# Altium PCB FPGA_board.PcbDoc (part 1 of 7)
Units mm, origin at the board's own origin, x right, y up, seen from the top; angles counter-clockwise.
Board outline 120 x 95 mm, 2 copper layers (Top Layer, Bottom Layer); 242 components, 219 nets, 1224 pads, 430 vias.
Unrouted connection lines stored in the file: 9.
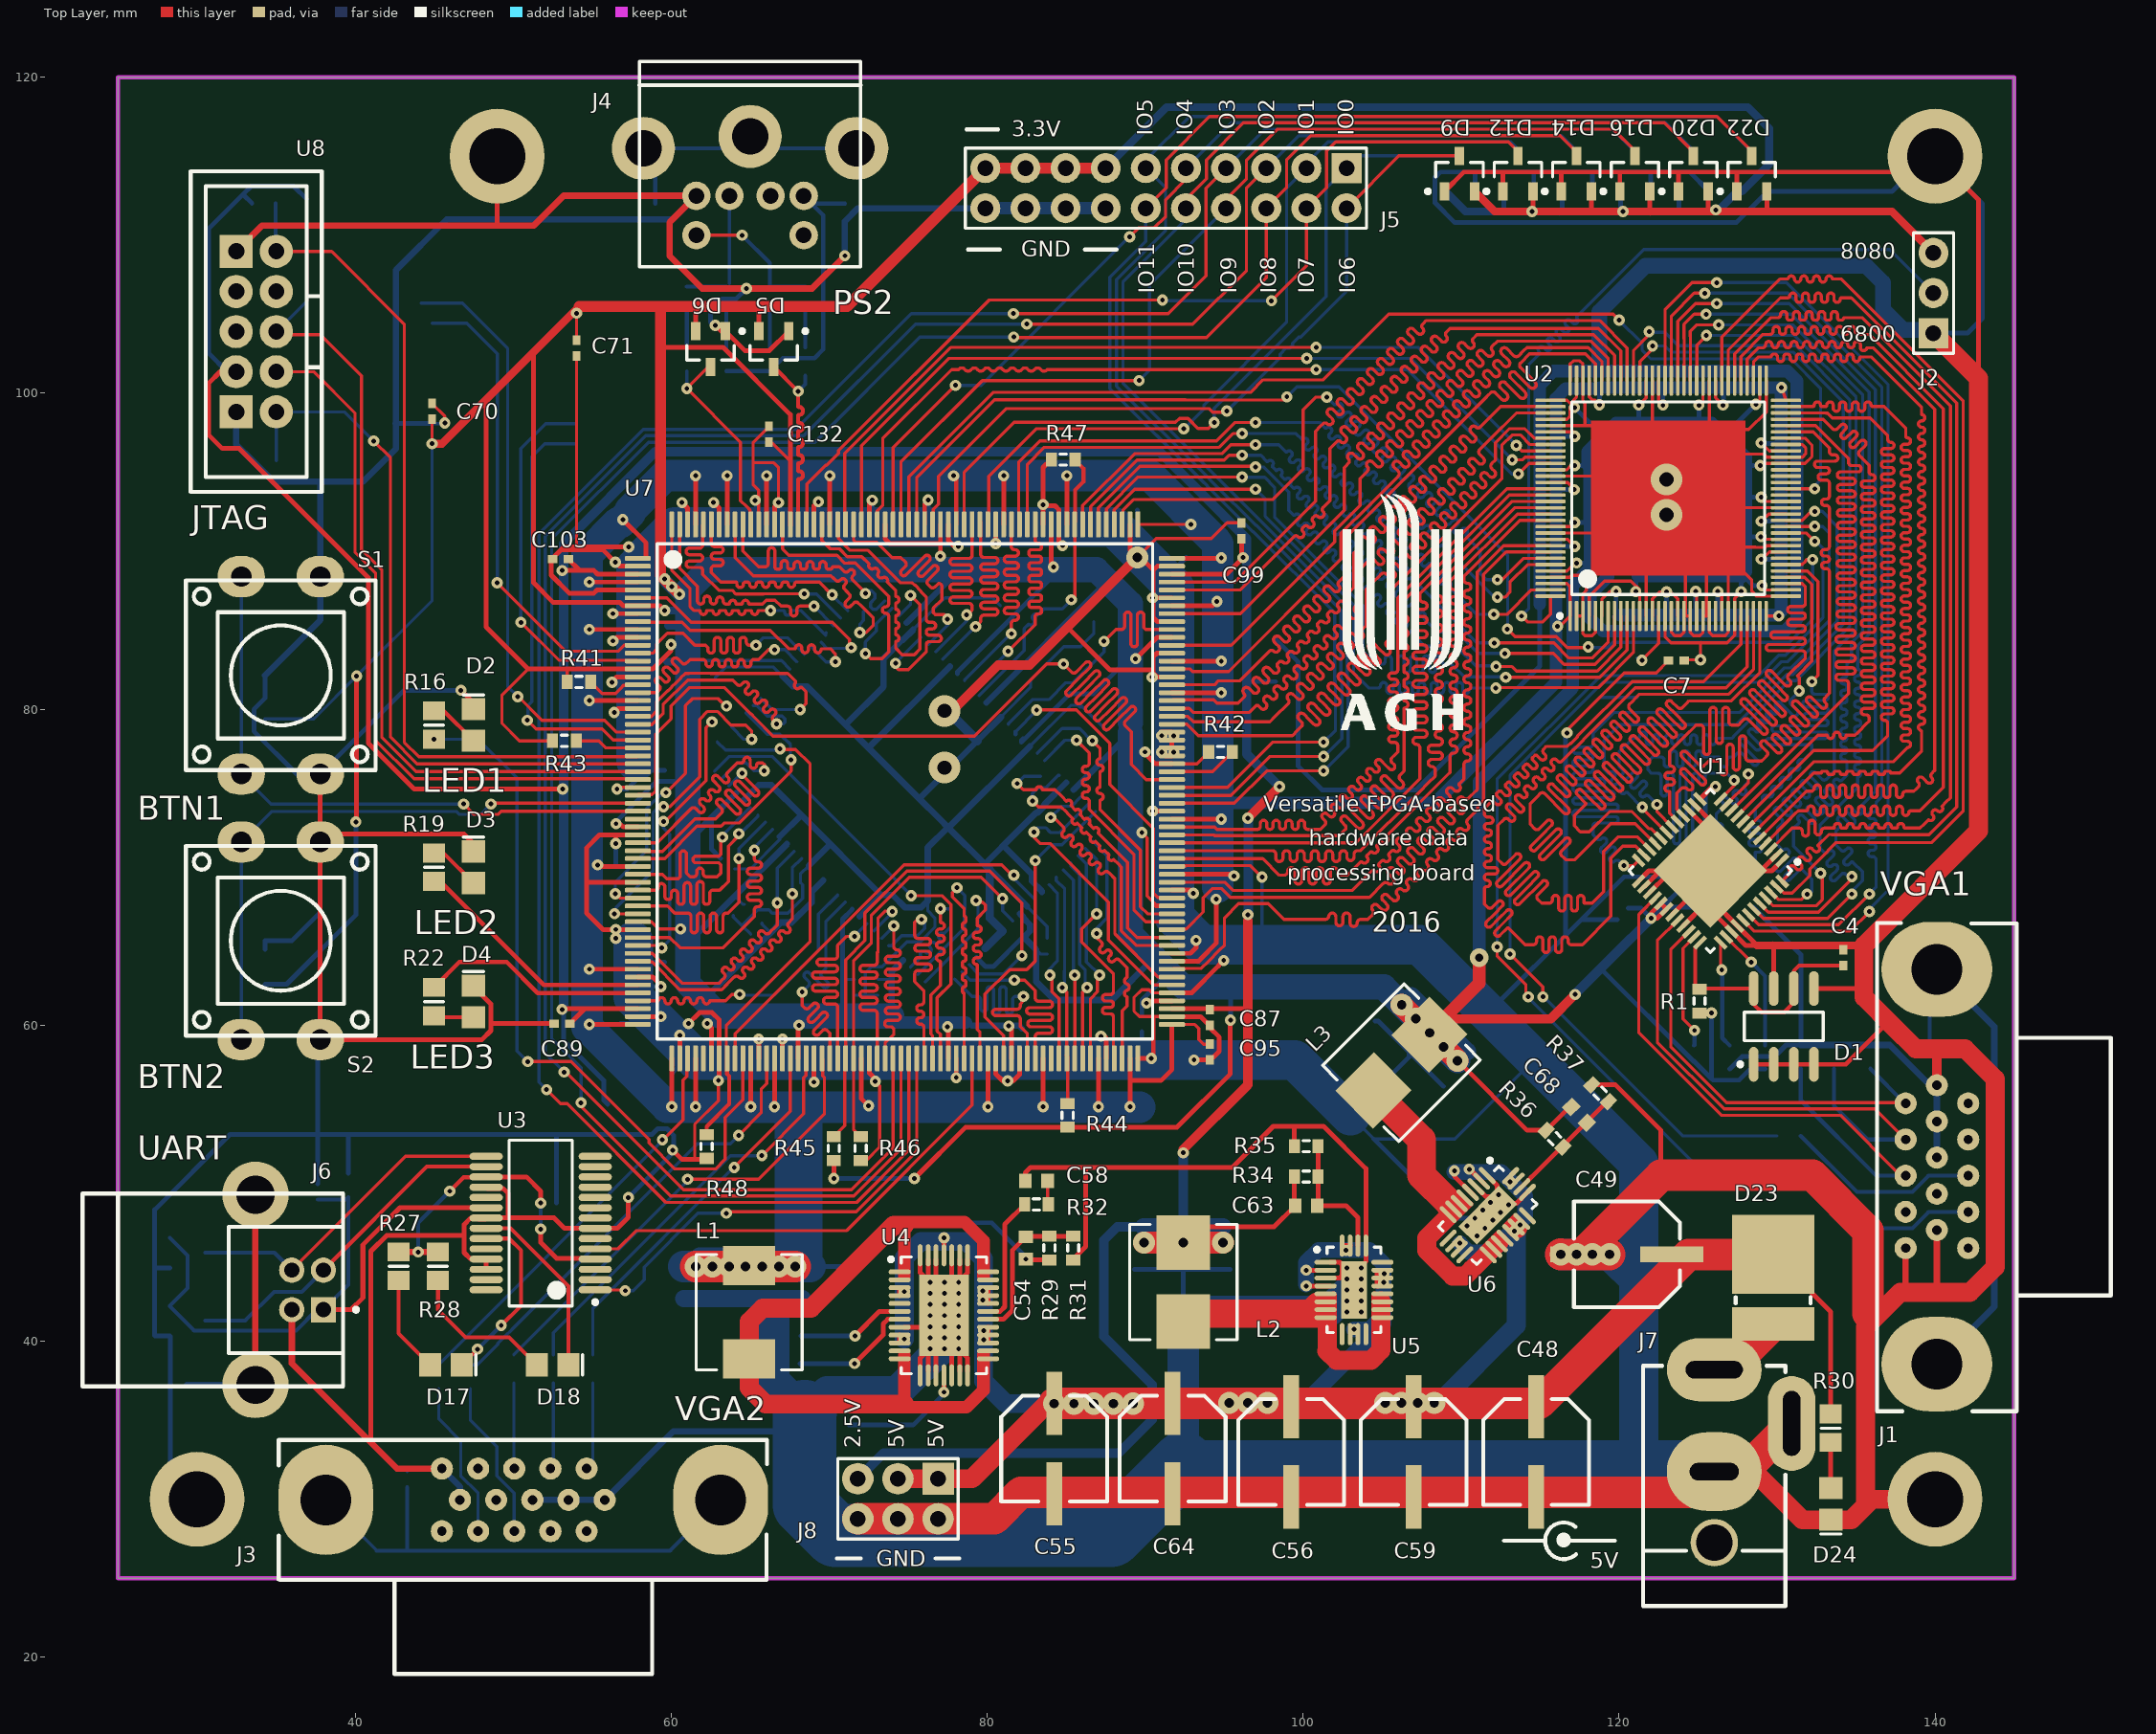
[diagram p0: Top Layer view]
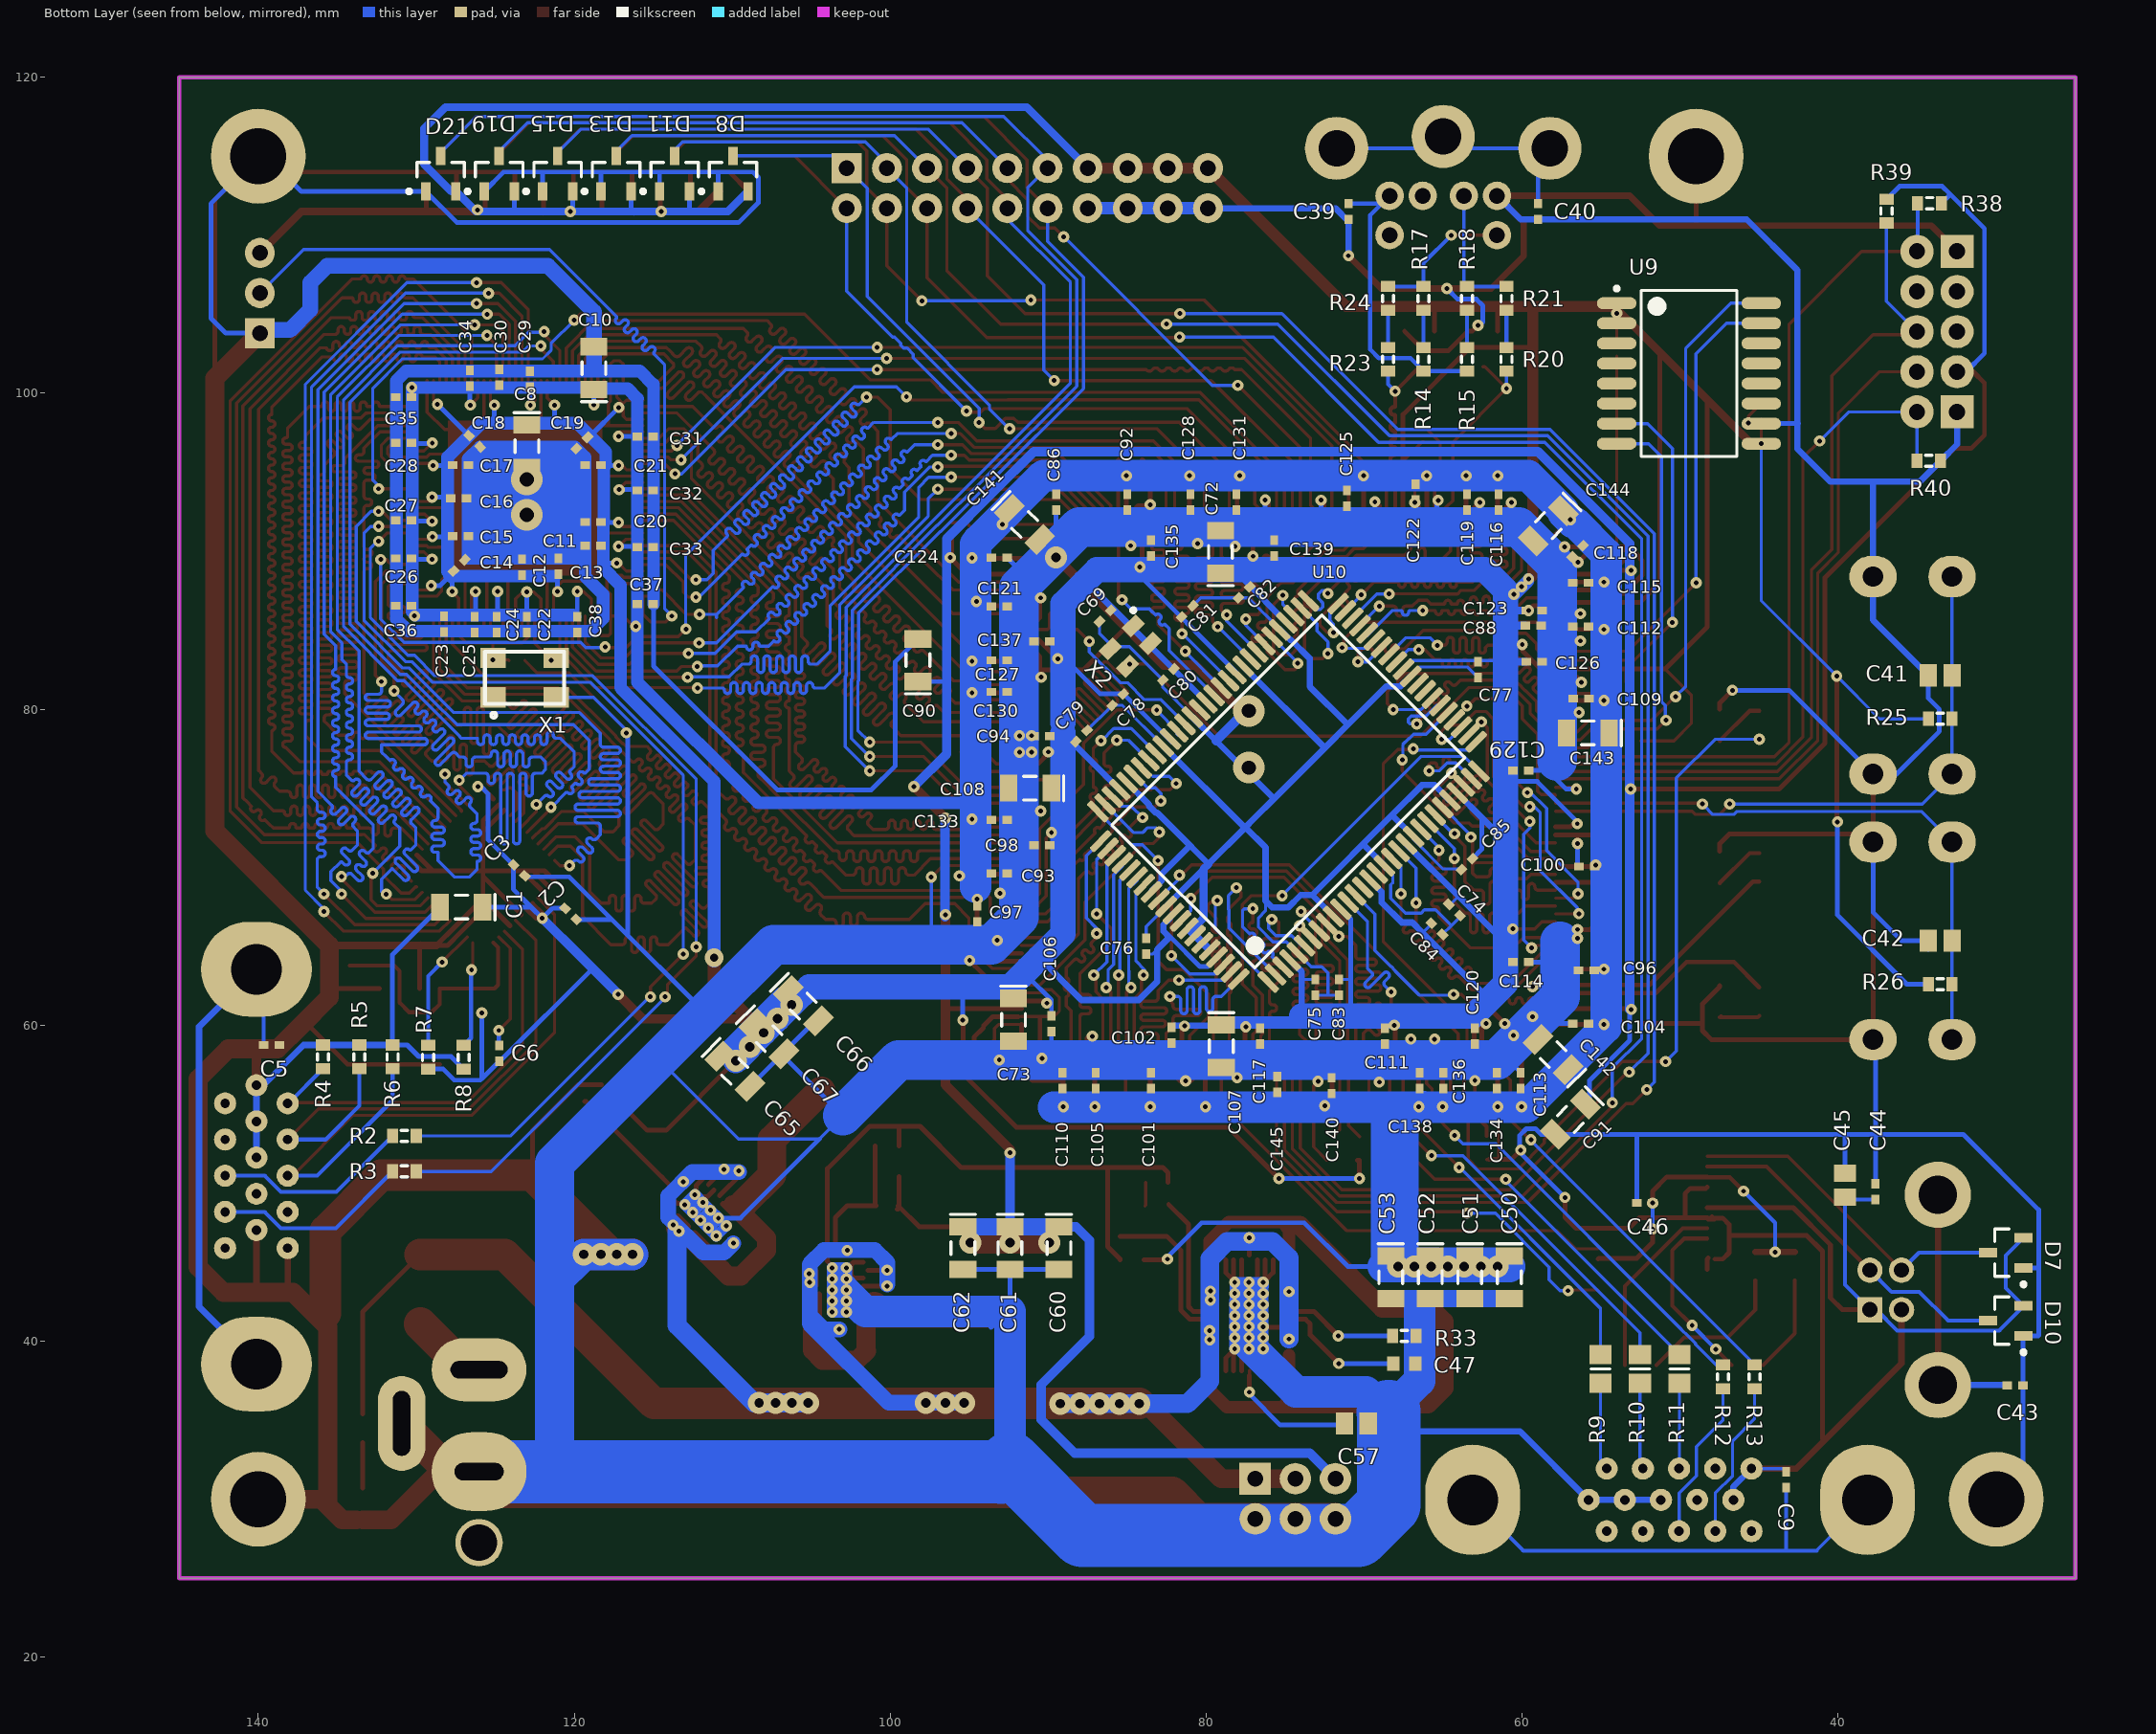
[diagram p1: Bottom Layer view, seen from below]

## Layer stack, top to bottom
Top Layer: signal copper 0.0356
Dielectric: dielectric 0.32, FR-4, Dk 4.8
Bottom Layer: signal copper 0.0356

## Board outline
25,25 25,120 145,120 145,25

## Design rules (kind name [scope] priority, off if disabled: settings)
Clearance [InComponent('U2')] p1: gap=0.18
Clearance others [All] p2: gap=0.2
ComponentClearance [All] p1 off: gap=0 collisioncheckmode=3 verticalgap=100 showdistances=FALSE
FanoutControl Fanout_BGA [IsBGA] p1 off: bgadir=Out bgaviamode=Centered fanoutstyle=Auto fanoutdirection=Alternating viagrid=0.025 // Fanout_BGA (Default Rule)
FanoutControl Fanout_LCC [IsLCC] p2 off: bgadir=Out bgaviamode=Centered fanoutstyle=Auto fanoutdirection=Alternating viagrid=0.025 // Fanout_LCC (Default Rule)
FanoutControl Fanout_SOIC [IsSOIC] p3 off: bgadir=Out bgaviamode=Centered fanoutstyle=Auto fanoutdirection=Alternating viagrid=0.025 // Fanout_SOIC (Default Rule)
FanoutControl Fanout_Small [(CompPinCount < 5)] p4 off: bgadir=Out bgaviamode=Centered fanoutstyle=Auto fanoutdirection=OutThenIn viagrid=0.025 // Fanout_Small (Default Rule)
FanoutControl Fanout_Default [All] p5: bgadir=In bgaviamode=Closest fanoutstyle=BGA fanoutdirection=Alternating viagrid=0.025 // Fanout_Default (Default Rule)
Height [All] p1 off: minheight=0 maxheight=25.4 prefheight=12.7
HoleSize [All] p1: absolutevalues=TRUE maxlimit=5 minlimit=0.3 maxpercent=80.000 minpercent=20.000
Length [InNetClass('MEM_TO_FPGA_DATA')] p1 off: maxlimit=17.23 minlimit=15
Length "InNet('SRAM_DQ5') Or InNet('SRAM_DQ9')" [InNet('SRAM_DQ[0..31]')] p2 off: maxlimit=19.148 minlimit=0
MinimumSolderMaskSliver [All] p1: minsoldermaskwidth=0
PlaneClearance [All] p1: clearance=1.5
PlaneConnect [All] p1: planeconnectstyle=Direct reliefexpansion=0.508 reliefentries=4 reliefconductorwidth=0.254 reliefairgap=0.254
PolygonConnect [All] p1: connectstyle=Relief reliefconductorwidth=1 reliefentries=4 polygonreliefangle="90 Angle" airgapwidth=0.254
RoutingVias [All] p1: holewidth=0.3 width=0.71 viastyle="Through Hole" minholewidth=0.3 minwidth=0.71 maxholewidth=2 maxwidth=2.75
SilkToSilkClearance [All] p1 off: silktosilkclearance=0.254
SilkToSolderMaskClearance [IsPad] p1 off: minsilkscreentomaskgap=0.254 clearancetoexposedcopper=TRUE
SolderMaskExpansion [All] p1: expansion=0.102
UnRoutedNet [All] p1 off:
ViasUnderSMD [All] p1 off: allowed=FALSE
Width VGA1 [InNetClass('VGA1')] p1: maxlimit=0.3 minlimit=0.203 preferedwidth=0.254
Width VGA2 [InNetClass('VGA2')] p2: maxlimit=0.3 minlimit=0.203 preferedwidth=0.254
Width Power [InNetClass('POWER')] p3: maxlimit=4 minlimit=0.2 preferedwidth=0.3
Width PORTS [InNetClass('PORTS')] p4: maxlimit=0.4 minlimit=0.203 preferedwidth=0.279
Width MEM_TO_FPGA [InNetClass('MEM_TO_FPGA') AND NOT InNet('3.3V') AND NOT InNet('GND')] p5: maxlimit=0.254 minlimit=0.203 preferedwidth=0.254
Width GND [InNet('GND')] p6: maxlimit=2 minlimit=0.2 preferedwidth=0.3
Width FB_TO_FPGA [InNetClass('FB_TO_FPGA')] p7: maxlimit=0.2 minlimit=0.2 preferedwidth=0.2
Width FB_TO_DAC [InNetClass('FB_TO_DAC')] p8: maxlimit=0.2 minlimit=0.2 preferedwidth=0.2
Width All_others [NOT InNetClass('POWER') AND NOT (InNet('5V') OR InNet('5V_IN') OR InNet('5V_USB')) AND NOT InNetClass('FB_TO_DAC') AND NOT InNetClass('MEM_TO_FPGA') AND NOT InNetClass('PORTS') AND NOT InNetClass('VGA2') AND NOT InNetClass('VGA1') AND NOT InNet('3.3V') AND NOT InNet('GND') AND NOT InNetClass('FB_TO_FPGA')] p9: maxlimit=0.4 minlimit=0.2 preferedwidth=0.254
Width 3.3V [InNet('3.3V')] p10: maxlimit=0.4 minlimit=0.203 preferedwidth=0.254
Width 5V [InNet('5V') OR InNet('5V_IN')] p11: maxlimit=0.6 minlimit=0.254 preferedwidth=0.45
14 further rules are at their usual default settings.

## Classes and differential pairs
net class GPI[0..7]: GPI0 GPI1 GPI2 GPI3 GPI4 GPI5 GPI6 GPI7
net class MEM_TO_FPGA_DATA: SRAM_DQ0 SRAM_DQ1 SRAM_DQ2 SRAM_DQ3 SRAM_DQ4 SRAM_DQ5 SRAM_DQ6 SRAM_DQ7 SRAM_DQ8 SRAM_DQ9 SRAM_DQ10 SRAM_DQ11 SRAM_DQ12 SRAM_DQ13 SRAM_DQ14 SRAM_DQ15 SRAM_DQ16 SRAM_DQ17 SRAM_DQ18 SRAM_DQ19 SRAM_DQ20 SRAM_DQ21 SRAM_DQ22 SRAM_DQ23 SRAM_DQ24 SRAM_DQ25 SRAM_DQ26 SRAM_DQ27 SRAM_DQ28 SRAM_DQ29 SRAM_DQ30 SRAM_DQ31 SRAM_PAR0 SRAM_PAR1 SRAM_PAR2 SRAM_PAR3
net class VGA2: VGA2_B VGA2_G VGA2_HSYNC VGA2_R VGA2_VSYNC
net class VGA1: VGA1_AB VGA1_AG VGA1_AR
net class VGA1_R[0..7]: VGA1_R0 VGA1_R1 VGA1_R2 VGA1_R3 VGA1_R4 VGA1_R5 VGA1_R6 VGA1_R7
net class VGA1_G[0..7]: VGA1_G0 VGA1_G1 VGA1_G2 VGA1_G3 VGA1_G4 VGA1_G5 VGA1_G6 VGA1_G7
net class VGA1_B[0..7]: VGA1_B0 VGA1_B1 VGA1_B2 VGA1_B3 VGA1_B4 VGA1_B5 VGA1_B6 VGA1_B7
net class SRAM_PAR[0..3]: SRAM_PAR0 SRAM_PAR1 SRAM_PAR2 SRAM_PAR3
net class SRAM_DQ[0..31]: SRAM_DQ0 SRAM_DQ1 SRAM_DQ2 SRAM_DQ3 SRAM_DQ4 SRAM_DQ5 SRAM_DQ6 SRAM_DQ7 SRAM_DQ8 SRAM_DQ9 SRAM_DQ10 SRAM_DQ11 SRAM_DQ12 SRAM_DQ13 SRAM_DQ14 SRAM_DQ15 SRAM_DQ16 SRAM_DQ17 SRAM_DQ18 SRAM_DQ19 SRAM_DQ20 SRAM_DQ21 SRAM_DQ22 SRAM_DQ23 SRAM_DQ24 SRAM_DQ25 SRAM_DQ26 SRAM_DQ27 SRAM_DQ28 SRAM_DQ29 SRAM_DQ30 SRAM_DQ31
net class SRAM_ADDR[0..18]: SRAM_ADDR0 SRAM_ADDR1 SRAM_ADDR2 SRAM_ADDR3 SRAM_ADDR4 SRAM_ADDR5 SRAM_ADDR6 SRAM_ADDR7 SRAM_ADDR8 SRAM_ADDR9 SRAM_ADDR10 SRAM_ADDR11 SRAM_ADDR12 SRAM_ADDR13 SRAM_ADDR14 SRAM_ADDR15 SRAM_ADDR16 SRAM_ADDR17 SRAM_ADDR18
net class POWER: 1.2V 2.5V 3.3V 5V_IN GND NetC47_1 NetC54_1 NetC57_2 NetC58_2 NetC63_1 NetC68_1 NetD23_1 NetD24_1 NetL1_1 NetL2_1 NetL3_1 NetR32_1 NetR33_1 NetU4_5 NetU5_9 NetU5_12 NetU5_20 NetU6_9 NetU6_12 NetU6_20
net class PORTS: BTN1 BTN2 GPI0 GPI1 GPI2 GPI3 GPI4 GPI5 GPI6 GPI7 GPIO0 GPIO1 GPIO2 GPIO3 LED1 LED2 LED3 PS2_CLK PS2_DATA UART_RXD UART_TXD
net class MEM_TO_FPGA: GND SRAM_ADDR0 SRAM_ADDR1 SRAM_ADDR2 SRAM_ADDR3 SRAM_ADDR4 SRAM_ADDR5 SRAM_ADDR6 SRAM_ADDR7 SRAM_ADDR8 SRAM_ADDR9 SRAM_ADDR10 SRAM_ADDR11 SRAM_ADDR12 SRAM_ADDR13 SRAM_ADDR14 SRAM_ADDR15 SRAM_ADDR16 SRAM_ADDR17 SRAM_ADDR18 SRAM_ADSC_N SRAM_ADSP_N SRAM_ADV_N SRAM_BWE_N SRAM_CE2_N SRAM_CE_N SRAM_CLK SRAM_DQ0 SRAM_DQ1 SRAM_DQ2 SRAM_DQ3 SRAM_DQ4 SRAM_DQ5 SRAM_DQ6 SRAM_DQ7 SRAM_DQ8 SRAM_DQ9 SRAM_DQ10 SRAM_DQ11 SRAM_DQ12 SRAM_DQ13 SRAM_DQ14 SRAM_DQ15 SRAM_DQ16 SRAM_DQ17 SRAM_DQ18 SRAM_DQ19 SRAM_DQ20 SRAM_DQ21 SRAM_DQ22 SRAM_DQ23 SRAM_DQ24 SRAM_DQ25 SRAM_DQ26 SRAM_DQ27 SRAM_DQ28 SRAM_DQ29 SRAM_DQ30 SRAM_DQ31 SRAM_MODE SRAM_OE_N SRAM_PAR0 SRAM_PAR1 SRAM_PAR2 SRAM_PAR3 SRAM_ZZ
net class GPIO[0..3]: GPIO0 GPIO1 GPIO2 GPIO3
net class FB_TO_FPGA: 10MHZ FB_INT_SEL VGA1_B0 VGA1_B1 VGA1_B2 VGA1_B3 VGA1_B4 VGA1_B5 VGA1_B6 VGA1_B7 VGA1_CS_N VGA1_DC_N VGA1_E_N VGA1_G0 VGA1_G1 VGA1_G2 VGA1_G3 VGA1_G4 VGA1_G5 VGA1_G6 VGA1_G7 VGA1_PIXEL_CLK VGA1_R0 VGA1_R1 VGA1_R2 VGA1_R3 VGA1_R4 VGA1_R5 VGA1_R6 VGA1_R7 VGA1_RESET_N VGA1_RW_N VGA1_TE
net class FB_TO_DAC: FB_BLANK FB_CLK FB_D0 FB_D1 FB_D2 FB_D3 FB_D4 FB_D5 FB_D6 FB_D7 FB_D8 FB_D9 FB_D10 FB_D11 FB_D12 FB_D13 FB_D14 FB_D15 FB_D16 FB_D17 FB_D18 FB_D19 FB_D20 FB_D21 FB_D22 FB_D23 FB_SYNC VGA1_HSYNC VGA1_VSYNC
component class Designator: C86 C87 C88 C89 C90 C91 C92 C93 C94 C95 C96 C97 C98 C99 C100 C101 C102 C103 C104 C105 C106 C107 C108 C109 C110 C111 C112 C113 C114 C115 C116 C117 C118 C119 C120 C121 C122 C123 C124 C125 C126 C127 C128 C129 C130 C131 C132 C133 C134 C135 C136 C137 C138 C139 C140 C141 C142 C143 C144 C145 U7

## Components (designator, comment, footprint, x,y, rotation, side; value= is the part's Value field where it differs from the comment)
C1 "Cap Pol2" C1206_POLARIZED 125.8,67.475 r0 bottom
C2 "Cap" 0402 120.225,67.05 r45 bottom
C3 "Cap" 0402 123.475,69.8 r45 bottom
C4 "Cap" 0402 134.2,64.275 r90 top
C5 "Cap" 0402 139.15,58.75 r0 bottom
C6 "Cap" 0402 124.75,58.225 r270 bottom
C7 "Cap" 0402 123.625,83.075 r180 top
C8 "Cap Pol2" C1206_POLARIZED 123,98 r270 bottom
C9 "Cap" 0402 43.3,31.25 r270 bottom
C10 "Cap Pol2" C1206_POLARIZED 118.753,100.247 r90 bottom
C11 "Cap" 0402 118.81,90.354 r0 bottom
C12 "Cap" 0402 123.3,89 r90 bottom
C13 "Cap" 0402 121.01,89.054 r90 bottom
C14 "Cap" 0402 127.285,89.104 r135 bottom
C15 "Cap" 0402 127.21,90.954 r180 bottom
C16 "Cap" 0402 127.31,93.354 r180 bottom
C17 "Cap" 0402 127.21,95.454 r180 bottom
C18 "Cap" 0402 126.31,96.954 r225 bottom
C19 "Cap" 0402 119.51,96.854 r315 bottom
C20 "Cap" 0402 118.81,91.854 r0 bottom
C21 "Cap" 0402 118.81,95.454 r0 bottom
C22 "Cap" 0402 123.01,85.354 r270 bottom
C23 "Cap" 0402 128.25,85.375 r270 bottom
C24 "Cap" 0402 124.91,85.354 r270 bottom
C25 "Cap" 0402 126.31,85.354 r270 bottom
C26 "Cap" 0402 130.81,89.554 r0 bottom
C27 "Cap" 0402 130.81,91.954 r0 bottom
C28 "Cap" 0402 130.81,96.854 r0 bottom
C29 "Cap" 0402 122.8,100.9 r90 bottom
C30 "Cap" 0402 124.75,101 r90 bottom
C31 "Cap" 0402 115.51,97.254 r180 bottom
C32 "Cap" 0402 115.51,93.854 r180 bottom
C33 "Cap" 0402 115.51,90.254 r180 bottom
C34 "Cap" 0402 126.61,100.954 r90 bottom
C35 "Cap" 0402 130.81,99.754 r0 bottom
C36 "Cap" 0402 130.81,86.554 r0 bottom
C37 "Cap" 0402 115.51,86.654 r180 bottom
C38 "Cap" 0402 119.81,85.354 r270 bottom
C39 "Cap" 0402 71,111.5 r90 bottom
C40 "Cap" 0402 59,111.5 r90 bottom
C41 "Cap" C0805 33.55,82.146 r180 bottom
C42 "Cap" C0805 33.55,65.346 r180 bottom
C43 "Cap" 0402 28.8,37.2 r0 bottom
C44 "Cap" 0402 37.65,49.475 r90 bottom
C45 "Cap" C0805 39.575,49.875 r270 bottom
C46 "Cap" 0402 52.25,48.75 r0 bottom
C47 "Cap" 1608[0603] 67.471,38.591 r180 bottom
C48 "Cap Pol2" C220_POLARIZED 114.75,33 r180 top
C49 "Cap Pol2" C220_POLARIZED 120.5,45.5 r90 top
C50 "Cap Pol2" C1206_POLARIZED 60.821,45.391 r270 bottom
C51 "Cap Pol2" C1206_POLARIZED 63.321,45.391 r270 bottom
C52 "Cap Pol2" C1206_POLARIZED 65.821,45.391 r270 bottom
C53 "Cap Pol2" C1206_POLARIZED 68.321,45.391 r270 bottom
C54 "Cap" 1608[0603] 82.45,45.9 r270 top
C55 "Cap Pol2" C220_POLARIZED 84.25,33.206 r180 top
C56 "Cap Pol2" C220_POLARIZED 99.25,33 r180 top
C57 "Cap" C0805 70.5,34.8 r0 bottom
C58 "Cap" 1608[0603] 83.129,50.159 r0 top
C59 "Cap Pol2" C220_POLARIZED 107,33 r180 top
C60 "Cap Pol2" C1206_POLARIZED 89.325,47.25 r270 bottom
C61 "Cap Pol2" C1206_POLARIZED 92.425,47.25 r270 bottom
C62 "Cap Pol2" C1206_POLARIZED 95.4,47.25 r270 bottom
C63 "Cap" 1608[0603] 100.2,48.575 r180 top
C64 "Cap Pol2" C220_POLARIZED 91.75,33.206 r180 top
C65 "Cap Pol2" C1206_POLARIZED 110.797,58.041 r225 bottom
C66 "Cap Pol2" C1206_POLARIZED 106.461,62.176 r225 bottom
C67 "Cap Pol2" C1206_POLARIZED 108.629,60.109 r225 bottom
C68 "Cap" 1608[0603] 117.469,54.333 r135 top
C69 "Cap" 0402 86.4,85.9 r135 bottom
C70 "Cap" 0402 44.875,98.85 r270 top
C71 "Cap" 0402 54.025,102.85 r90 top
C72 "Cap Pol2" C1206_POLARIZED 79.1,88.6 r90 bottom
C73 "Cap Pol2" C1206_POLARIZED 92.2,61.7 r270 bottom
C74 "Cap" 0402 64.3,67.3 r225 bottom
C75 "Cap" 0402 73.1,62.4 r270 bottom
C76 "Cap" 0402 83.8,65 r90 bottom
C77 "Cap" 0402 62.8,82.5 r270 bottom
C78 "Cap" 0402 85.6,80.6 r315 bottom
C79 "Cap" 0402 87.9,78.3 r135 bottom
C80 "Cap" 0402 82.4,82.2 r315 bottom
C81 "Cap" 0402 81.2,86.2 r135 bottom
C82 "Cap" 0402 77.6,87.4 r315 bottom
C83 "Cap" 0402 71.6,62.4 r270 bottom
C84 "Cap" 0402 65.4,66.1 r225 bottom
C85 "Cap" 0402 63.5,70.2 r315 bottom
C86 "Cap" 0402 89.5,93.1 r270 bottom
C87 "Cap" 0402 94.1,58.3 r270 top
C88 "Cap" 0402 59.3,85.3 r180 bottom
C89 "Cap" 0402 53.1,60.1 r180 top
C90 "Cap" C1206_POLARIZED 98.25,81.75 r90 bottom
C91 "Cap" C1206_POLARIZED 56,55 r315 bottom
C92 "Cap" 0402 85,93.1 r270 bottom
C93 "Cap" 0402 93.1,69.6 r180 bottom
C94 "Cap" 0402 90.4,78.3 r0 bottom
C95 "Cap" 0402 94.1,60.5 r270 top
C96 "Cap" 0402 55.95,63.475 r0 bottom
C97 "Cap" 0402 94.5,67.05 r270 bottom
C98 "Cap" 0402 90.4,71.4 r0 bottom
C99 "Cap" 0402 96.1,91.3 r90 top
C100 "Cap" 0402 55.925,70.05 r0 bottom
C101 "Cap" 0402 83.5,56.5 r90 bottom
C102 "Cap" 0402 82.2,59.375 r270 bottom
C103 "Cap" 0402 53,89.5 r180 top
C104 "Cap" 0402 56.3,60.1 r0 bottom
C105 "Cap" 0402 87,56.5 r90 bottom
C106 "Cap" 0402 89.8,60.1 r270 bottom
C107 "Cap" C1206_POLARIZED 79.05,60.025 r270 bottom
C108 "Cap" C1206_POLARIZED 89.8,75 r0 bottom
C109 "Cap" 0402 56.275,80.675 r0 bottom
C110 "Cap" 0402 89.1,56.5 r90 bottom
C111 "Cap" 0402 68.7,59.3 r270 bottom
C112 "Cap" 0402 56.3,85.225 r0 bottom
C113 "Cap" 0402 60.1,56.5 r90 bottom
C114 "Cap" 0402 60.1,64 r180 bottom
C115 "Cap" 0402 56.3,88 r0 bottom
C116 "Cap" 0402 61.5,93.1 r270 bottom
C117 "Cap" 0402 76.6,59.3 r270 bottom
C118 "Cap" 0402 56.5,90 r315 bottom
C119 "Cap" 0402 63.5,93.1 r270 bottom
C120 "Cap" 0402 63,59.3 r270 bottom
C121 "Cap" 0402 93.1,86.5 r180 bottom
C122 "Cap" 0402 66.75,93.75 r270 bottom
C123 "Cap" 0402 59.25,86.25 r180 bottom
C124 "Cap" 0402 93.1,89.6 r180 bottom
C125 "Cap" 0402 71.1,93.35 r270 bottom
C126 "Cap" 0402 59.25,83 r180 bottom
C127 "Cap" 0402 93.1,83.1 r180 bottom
C128 "Cap" 0402 81,93.1 r270 bottom
C129 "Cap" 0402 60.1,76.125 r180 bottom
C130 "Cap" 0402 93.1,81.1 r180 bottom
C131 "Cap" 0402 78.1,93.1 r270 bottom
C132 "Cap" 0402 66.2,97.4 r90 top
C133 "Cap" 0402 93.1,73 r180 bottom
C134 "Cap" 0402 61.6,56.5 r90 bottom
C135 "Cap" 0402 83.5,90.2 r90 bottom
C136 "Cap" 0402 65,56.5 r90 bottom
C137 "Cap" 0402 90.4,84.3 r0 bottom
C138 "Cap" 0402 66.5,56.5 r90 bottom
C139 "Cap" 0402 75.7,90.2 r90 bottom
C140 "Cap" 0402 72.075,56.175 r90 bottom
C141 "Cap Pol2" C1206_POLARIZED 92.45,92.65 r225 bottom
C142 "Cap Pol2" C1206_POLARIZED 57.1,57.2 r45 bottom
C143 "Cap" C1206_POLARIZED 54.5,78.5 r0 bottom
C144 "Cap" C1206_POLARIZED 57.4,92.575 r315 bottom
C145 "Cap" 0402 75.5,56.25 r90 bottom
D1 "LT1004-1.2" S8 130.425,59.925 r90 top
D2 "LED1" LED 47.5,79 r90 top
D3 "LED2" LED 47.5,70 r90 top
D4 "LED3" LED 47.5,61.5 r90 top
D5 "BAT54S" SOT23_BAT54S 66.5,102.8 r270 top
D6 "BAT54S" SOT23_BAT54S 62.5,102.8 r270 top
D7 "BAT54S" SOT23_BAT54S 29.4,45.6 r0 bottom
D8 "BAT54S" SOT23_BAT54S 109.95,113.9 r90 bottom
D9 "BAT54S" SOT23_BAT54S 109.9,113.9 r90 top
D10 "BAT54S" SOT23_BAT54S 29.4,41.3 r0 bottom
D11 "BAT54S" SOT23_BAT54S 113.65,113.9 r90 bottom
D12 "BAT54S" SOT23_BAT54S 113.6,113.9 r90 top
D13 "BAT54S" SOT23_BAT54S 117.35,113.9 r90 bottom
D14 "BAT54S" SOT23_BAT54S 117.3,113.9 r90 top
D15 "BAT54S" SOT23_BAT54S 121.05,113.9 r90 bottom
D16 "BAT54S" SOT23_BAT54S 121,113.9 r90 top
D17 "TXD" LED 45.75,38.5 r0 top
D18 "RXD" LED 52.5,38.5 r0 top
D19 "BAT54S" SOT23_BAT54S 124.75,113.9 r90 bottom
D20 "BAT54S" SOT23_BAT54S 124.7,113.9 r90 top
D21 "BAT54S" SOT23_BAT54S 128.45,113.9 r90 bottom
D22 "BAT54S" SOT23_BAT54S 128.4,113.9 r90 top
D23 "V15P45S-M3" TO-227A 129.75,44 r0 top
D24 "POWER" LED 133.4,29.7 r270 top
J1 "VGA1" VGA_SOCKET 136.325,66.45 r0 top
J2 "FB_INTERFACE" HDR1X3 139.9,103.8 r90 top
J3 "VGA2" VGA_SOCKET 66.05,33.75 r270 top
J4 "PS2" PS2-6PIN 65,121 r0 top
J5 "GPIO" HDR2X10_CEN 102.75,114.25 r180 top
J6 "UART" USB_B 38,43.25 r270 top
J7 "5V(+IN)" DC_JACK 126.025,23.25 r0 top
J8 "POWER" HDR2X3_CEN 76.9,31.3 r180 top
L1 "Inductor" INDP7367X100N 64.946,41.841 r90 top
L2 "Inductor" IHLP-2525CZ 92.425,43.75 r90 top
L3 "Inductor" IHLP-2525CZ 106.225,57.634 r45 top
R1 "Res2" J1-0603 125.1,61.525 r270 top
R2 "Res2" J1-0603 130.75,53 r180 bottom
R3 "Res2" J1-0603 130.75,50.75 r180 bottom
R4 "Res2" J1-0603 135.9,58 r270 bottom
R5 "Res2" J1-0603 133.6,58 r90 bottom
R6 "Res2" J1-0603 131.5,58 r90 bottom
R7 "Res2" J1-0603 129.25,57.975 r90 bottom
R8 "Res2" J1-0603 127,57.975 r90 bottom
R9 "Res2" 6-0805_N 55.05,38.25 r90 bottom
R10 "Res2" 6-0805_N 52.55,38.25 r90 bottom
R11 "Res2" 6-0805_N 50.05,38.25 r90 bottom
R12 "Res2" J1-0603 47.3,37.75 r90 bottom
R13 "Res2" J1-0603 45.3,37.75 r90 bottom
R14 "Res2" J1-0603 66.25,102.15 r270 bottom
R15 "Res2" J1-0603 63.5,102.15 r270 bottom
R16 "Res2" 6-0805_N 45,79 r270 top
R17 "Res2" J1-0603 66.25,106 r270 bottom
R18 "Res2" J1-0603 63.5,106 r270 bottom
R19 "Res2" 6-0805_N 45,70 r270 top
R20 "Res2" J1-0603 61,102.15 r90 bottom
R21 "Res2" J1-0603 61,106 r90 bottom
R22 "Res2" 6-0805_N 45,61.5 r90 top
R23 "Res2" J1-0603 68.5,102.15 r90 bottom
R24 "Res2" J1-0603 68.5,106 r90 bottom
R25 "Res2" J1-0603 33.55,79.396 r180 bottom
R26 "Res2" J1-0603 33.55,62.596 r180 bottom
R27 "Res2" 6-0805_N 42.75,44.75 r90 top
R28 "Res2" 6-0805_N 45.25,44.75 r90 top
R29 "Res2" J1-0603 83.95,45.9 r90 top
R30 "Res2" 6-0805_N 133.4,34.5 r270 top
R31 "Res2" J1-0603 85.45,45.9 r270 top
R32 "Res2" J1-0603 83.129,48.659 r0 top
R33 "Res2" J1-0603 67.471,40.341 r180 bottom
R34 "Res2" J1-0603 100.2,50.425 r0 top
R35 "Res2" J1-0603 100.2,52.35 r180 top
R36 "Res2" J1-0603 115.917,52.821 r315 top
R37 "Res2" J1-0603 118.8,55.7 r135 top
R38 "Res2" J1-0603 34.225,112.025 r0 bottom
R39 "Res2" J1-0603 36.95,111.525 r270 bottom
R40 "Res2" J1-0603 34.275,95.725 r0 bottom
R41 "Res2" J1-0603 54.175,81.725 r0 top
R42 "Res2" J1-0603 94.775,77.3 r0 top
R43 "Res2" J1-0603 53.25,78 r0 top
R44 "Res2" J1-0603 85.1,54.3 r90 top
R45 "Res2" J1-0603 70.3,52.2 r90 top
R46 "Res2" J1-0603 72,52.2 r270 top
R47 "Res2" J1-0603 84.825,95.8 r180 top
R48 "Res2" J1-0603 62.25,52.325 r270 top
S1 "BTN1" PUSHBUTTON 41.3,88.146 r270 top
S2 "BTN2" PUSHBUTTON 41.3,71.346 r270 top
U1 "ADV7125" LFCSP_VQ48 125.775,69.775 r225 top
U2 "SSD1963" LQFP128-0.4 123.11,93.353 r90 top
U3 "FT232R" SSOP28 51.75,47.475 r180 top
U4 "LTC3418" QFN38 77.271,41.641 r0 top
U5 "LTC3616" QFN24 103.225,43.25 r0 top
U6 "LTC3616" QFN24 111.69,47.977 r315 top
U7 "EP3C40Q240" PQFP240 74.8,74.8 r0 top
U8 "JTAG" JTAG_CONN 29.6,94.7 r90 top
U9 "EPCS64" SOIC16 49.45,101.25 r180 bottom locked
U10 "IS61LPS51236A" TQFP100 74.8,74.8 r45 bottom
X1 "10MHz" FOX924 125.15,83.25 r180 bottom
X2 "50MHz" ASDMB 84.8,84 r225 bottom

## Footprints (in the part's own frame and the unit in brackets; to place one, negate y for a bottom-side part, rotate by r counter-clockwise, add the part's x,y. Pads: shape width x height; smd on the part's side, far side on the other; paste and mask are expansions set on the pad)
6-0805_N [mm] "Chip Resistor, Body 2.0x1.2mm, IPC Medium Density"
  rect 1.2x1.4 smd: 1(-0.9,0) 2(0.9,0)
  silkscreen extent 0,-0.6 0,0.6, body extent -1.08,-0.7 1.08,0.7, height 0.7
0402 [mm] "Chip Capacitor, Body 1.0x0.5mm, IPC High Density"
  rect 0.6x0.5 smd: 1(-0.5,0) 2(0.5,0)
  body extent -0.55,-0.3 0.55,0.3, height 1.3
1608[0603] [mm] "Chip Capacitor, Body 1.6x0.8mm, IPC High Density"
  rect 0.8x0.9 smd: 1(-0.7,0) 2(0.7,0)
  body extent -0.88,-0.48 0.87,0.47, height 1.3
ASDMB [mm]
  rect 0.85x1.25 smd: 1(-0.775,1.025) 2(-0.775,-1.025) 3(0.775,-1.025) 4(0.775,1.025)
  silkscreen extent -1.6,1.6 -1.35,1.85, body extent -1.02,-1.28 1.03,1.27, height 0.9
C220_POLARIZED [mm]
  rect 1x4 smd: 1(0,-2.85) 2(0,2.85)
  silkscreen extent -3.35,-3.35 3.35,3.35
C0805 [mm] "Chip Capacitor, Body 2.0x1.3mm, IPC High Density"
  rect 1.1x1.4 smd: 1(-0.75,0) 2(0.75,0)
  body extent -1.1,-0.73 1.1,0.72, height 1.4
C1206_POLARIZED [mm]
  rect 1.1x1.7 smd: 1(0,0) 2(2.7,0)
  silkscreen extent -0.78,-0.8 1.75,0.8, body extent -0.35,-0.9 3.05,0.9, height 1.3
DC_JACK [mm]
  round 3 hole 2.3: 0(0,4)
  oval 6x4 hole 1.1 slot 3.6 at 0 deg: 1(0,14.95)
  oval 6x5 hole 1.1 slot 3.1 at 0 deg: 2(0,8.5)
  oval 3x6 hole 1.1 slot 4.1 at 90 deg: 3(4.9,11.55)
  silkscreen extent -4.5,0 4.5,15.2
FOX924 [mm]
  rect 1.6x1.3 smd: 1(0,-2.5) 2(4,-2.5) 3(4,0) 4(0,0)
  silkscreen extent -0.5,-3.77 4.5,0.4
HDR1X3 [mm] "Connector; Header; 3 Position"
  rect 1.9x1.9 hole 1: 1(0,0)
  round 1.9 hole 1: 2(2.54,0) 3(5.08,0)
  silkscreen extent -1.27,-1.27 6.35,1.27
HDR2X3_CEN [mm] "Connector; Header; 3x2 Position"
  rect 2x2 hole 1: 1(0,0)
  round 2 hole 1: 2(2.54,0) 3(5.08,0) 4(0,2.54) 5(2.54,2.54) 6(5.08,2.54)
  silkscreen extent -1.27,-1.27 6.35,3.81
HDR2X10_CEN [mm] "Connector; Header; 10x2 Position"
  rect 1.9x1.9 hole 1: 1(0,0)
  round 1.9 hole 1: 2(2.54,0) 3(5.08,0) 4(7.62,0) 5(10.16,0) 6(12.7,0) 7(15.24,0) 8(17.78,0) 9(20.32,0) 10(22.86,0) 11(0,2.54) 12(2.54,2.54) 13(5.08,2.54) 14(7.62,2.54) 15(10.16,2.54) 16(12.7,2.54) 17(15.24,2.54) 18(17.78,2.54) 19(20.32,2.54) 20(22.86,2.54)
  silkscreen extent -1.27,-1.27 24.13,3.81
IHLP-2525CZ [mm] "Molded Inductor, 2-Leads, Body 6,86x6,47mm, IPC Medium Density"
  rect 3.45x3.4 smd: 1(-2.5,0) 2(2.5,0)
  silkscreen extent -3.65,-3.4 3.65,3.4, body extent -3.62,-3.36 3.62,3.36, height 3
INDP7367X100N [mm] "Precision Wire Wound Inductor, 2-Leads, Body 7,25x6,7mm, IPC Medium Density"
  rect 2.5x3.3 smd: 1(-2.95,0) 2(2.95,0)
  silkscreen extent -3.65,-3.35 3.65,3.35, body extent -3.62,-3.35 3.63,3.35, height 10
J1-0603 [mm] "Chip Resistor, Body 1.6x0.8mm, IPC High Density"
  rect 0.7x0.9 smd: 1(-0.75,0) 2(0.75,0)
  silkscreen extent -0.2,-0.35 0.2,0.35, body extent -0.85,-0.48 0.85,0.47, height 0.9
JTAG_CONN [mm]
  round 2.1 hole 1.02: 1(4.12,-5.42) 3(6.66,-5.42) 4(6.66,-2.88) 5(9.2,-5.42) 6(9.2,-2.88) 7(11.74,-5.42) 8(11.74,-2.88) 9(14.28,-5.42)
  rect 2.1x2.1 hole 1.02: 2(4.12,-2.88) 10(14.28,-2.88)
  silkscreen extent -0.95,-8.3 19.35,0, body extent -1.08,-8.43 19.48,0.13, height 8.9
LED [mm]
  rect 1.4x1.5 smd: 1(-1,0) 2(1,0)
  silkscreen extent 1.9,-0.65 1.9,0.65, body extent -1.07,-0.7 1.07,0.7, height 0.7
LFCSP_VQ48 [mm] "QFN, 48-Leads, Body 7,00x7,00mm, Pitch 0,50mm, Thermal Pad 5,10x5,10mm, IPC Low Density"
  rect 1x0.3 smd: 1(-3.675,2.75) 2(-3.675,2.25) 3(-3.675,1.75) 4(-3.675,1.25) 5(-3.675,0.75) 6(-3.675,0.25) 7(-3.675,-0.25) 8(-3.675,-0.75) 9(-3.675,-1.25) 10(-3.675,-1.75) 11(-3.675,-2.25) 12(-3.675,-2.75) 25(3.675,-2.75) 26(3.675,-2.25) 27(3.675,-1.75) 28(3.675,-1.25) 29(3.675,-0.75) 30(3.675,-0.25) 31(3.675,0.25) 32(3.675,0.75) 33(3.675,1.25) 34(3.675,1.75) 35(3.675,2.25) 36(3.675,2.75)
  rect 0.3x1 smd: 13(-2.75,-3.675) 14(-2.25,-3.675) 15(-1.75,-3.675) 16(-1.25,-3.675) 17(-0.75,-3.675) 18(-0.25,-3.675) 19(0.25,-3.675) 20(0.75,-3.675) 21(1.25,-3.675) 22(1.75,-3.675) 23(2.25,-3.675) 24(2.75,-3.675) 37(2.75,3.675) 38(2.25,3.675) 39(1.75,3.675) 40(1.25,3.675) 41(0.75,3.675) 42(0.25,3.675) 43(-0.25,3.675) 44(-0.75,3.675) 45(-1.25,3.675) 46(-1.75,3.675) 47(-2.25,3.675) 48(-2.75,3.675)
  rect 5.1x5.1 smd: 49(0,0)
  silkscreen extent -4.42,-3.65 3.65,3.65, body extent -3.5,-3.5 3.5,3.5, height 1
LQFP128-0.4 [mm]
  rrect50% 1.9x0.22 smd: 1(-7.45,6.2) 2(-7.45,5.8) 3(-7.45,5.4) 4(-7.45,5) 5(-7.45,4.6) 6(-7.45,4.2) 7(-7.45,3.8) 8(-7.45,3.4) 9(-7.45,3) 10(-7.45,2.6) 11(-7.45,2.2) 12(-7.45,1.8) 13(-7.45,1.4) 14(-7.45,1) 15(-7.45,0.6) 16(-7.45,0.2) 17(-7.45,-0.2) 18(-7.45,-0.6) 19(-7.45,-1) 20(-7.45,-1.4) 21(-7.45,-1.8) 22(-7.45,-2.2) 23(-7.45,-2.6) 24(-7.45,-3) 25(-7.45,-3.4) 26(-7.45,-3.8) 27(-7.45,-4.2) 28(-7.45,-4.6) 29(-7.45,-5) 30(-7.45,-5.4) 31(-7.45,-5.8) 32(-7.45,-6.2) 65(7.45,-6.2) 66(7.45,-5.8) 67(7.45,-5.4) 68(7.45,-5) 69(7.45,-4.6) 70(7.45,-4.2) 71(7.45,-3.8) 72(7.45,-3.4) 73(7.45,-3) 74(7.45,-2.6) 75(7.45,-2.2) 76(7.45,-1.8) 77(7.45,-1.4) 78(7.45,-1) 79(7.45,-0.6) 80(7.45,-0.2) 81(7.45,0.2) 82(7.45,0.6) 83(7.45,1) 84(7.45,1.4) 85(7.45,1.8) 86(7.45,2.2) 87(7.45,2.6) 88(7.45,3) 89(7.45,3.4) 90(7.45,3.8) 91(7.45,4.2) 92(7.45,4.6) 93(7.45,5) 94(7.45,5.4) 95(7.45,5.8) 96(7.45,6.2)
  rrect50% 0.22x1.9 smd: 33(-6.2,-7.45) 34(-5.8,-7.45) 35(-5.4,-7.45) 36(-5,-7.45) 37(-4.6,-7.45) 38(-4.2,-7.45) 39(-3.8,-7.45) 40(-3.4,-7.45) 41(-3,-7.45) 42(-2.6,-7.45) 43(-2.2,-7.45) 44(-1.8,-7.45) 45(-1.4,-7.45) 46(-1,-7.45) 47(-0.6,-7.45) 48(-0.2,-7.45) 49(0.2,-7.45) 50(0.6,-7.45) 51(1,-7.45) 52(1.4,-7.45) 53(1.8,-7.45) 54(2.2,-7.45) 55(2.6,-7.45) 56(3,-7.45) 57(3.4,-7.45) 58(3.8,-7.45) 59(4.2,-7.45) 60(4.6,-7.45) 61(5,-7.45) 62(5.4,-7.45) 63(5.8,-7.45) 64(6.2,-7.45) 97(6.2,7.45) 98(5.8,7.45) 99(5.4,7.45) 100(5,7.45) 101(4.6,7.45) 102(4.2,7.45) 103(3.8,7.45) 104(3.4,7.45) 105(3,7.45) 106(2.6,7.45) 107(2.2,7.45) 108(1.8,7.45) 109(1.4,7.45) 110(1,7.45) 111(0.6,7.45) 112(0.2,7.45) 113(-0.2,7.45) 114(-0.6,7.45) 115(-1,7.45) 116(-1.4,7.45) 117(-1.8,7.45) 118(-2.2,7.45) 119(-2.6,7.45) 120(-3,7.45) 121(-3.4,7.45) 122(-3.8,7.45) 123(-4.2,7.45) 124(-4.6,7.45) 125(-5,7.45) 126(-5.4,7.45) 127(-5.8,7.45) 128(-6.2,7.45)
  silkscreen extent -7.57,-6.1 6.1,6.98, body extent -7,-7 7,7, height 1.6
PQFP240 [mm] "SQFP, 240-Leads, Body 32,00x32,00mm, Pitch 0,50mm, IPC Medium Density"
  rrect50% 1.65x0.3 smd: 1(-16.9,14.75) 2(-16.9,14.25) 3(-16.9,13.75) 4(-16.9,13.25) 5(-16.9,12.75) 6(-16.9,12.25) 7(-16.9,11.75) 8(-16.9,11.25) 9(-16.9,10.75) 10(-16.9,10.25) 11(-16.9,9.75) 12(-16.9,9.25) 13(-16.9,8.75) 14(-16.9,8.25) 15(-16.9,7.75) 16(-16.9,7.25) 17(-16.9,6.75) 18(-16.9,6.25) 19(-16.9,5.75) 20(-16.9,5.25) 21(-16.9,4.75) 22(-16.9,4.25) 23(-16.9,3.75) 24(-16.9,3.25) 25(-16.9,2.75) 26(-16.9,2.25) 27(-16.9,1.75) 28(-16.9,1.25) 29(-16.9,0.75) 30(-16.9,0.25) 31(-16.9,-0.25) 32(-16.9,-0.75) 33(-16.9,-1.25) 34(-16.9,-1.75) 35(-16.9,-2.25) 36(-16.9,-2.75) 37(-16.9,-3.25) 38(-16.9,-3.75) 39(-16.9,-4.25) 40(-16.9,-4.75) 41(-16.9,-5.25) 42(-16.9,-5.75) 43(-16.9,-6.25) 44(-16.9,-6.75) 45(-16.9,-7.25) 46(-16.9,-7.75) 47(-16.9,-8.25) 48(-16.9,-8.75) 49(-16.9,-9.25) 50(-16.9,-9.75) 51(-16.9,-10.25) 52(-16.9,-10.75) 53(-16.9,-11.25) 54(-16.9,-11.75) 55(-16.9,-12.25) 56(-16.9,-12.75) 57(-16.9,-13.25) 58(-16.9,-13.75) 59(-16.9,-14.25) 60(-16.9,-14.75) 121(16.9,-14.75) 122(16.9,-14.25) 123(16.9,-13.75) 124(16.9,-13.25) 125(16.9,-12.75) 126(16.9,-12.25) 127(16.9,-11.75) 128(16.9,-11.25) 129(16.9,-10.75) 130(16.9,-10.25) 131(16.9,-9.75) 132(16.9,-9.25) 133(16.9,-8.75) 134(16.9,-8.25) 135(16.9,-7.75) 136(16.9,-7.25) 137(16.9,-6.75) 138(16.9,-6.25) 139(16.9,-5.75) 140(16.9,-5.25) 141(16.9,-4.75) 142(16.9,-4.25) 143(16.9,-3.75) 144(16.9,-3.25) 145(16.9,-2.75) 146(16.9,-2.25) 147(16.9,-1.75) 148(16.9,-1.25) 149(16.9,-0.75) 150(16.9,-0.25) 151(16.9,0.25) 152(16.9,0.75) 153(16.9,1.25) 154(16.9,1.75) 155(16.9,2.25) 156(16.9,2.75) 157(16.9,3.25) 158(16.9,3.75) 159(16.9,4.25) 160(16.9,4.75) 161(16.9,5.25) 162(16.9,5.75) 163(16.9,6.25) 164(16.9,6.75) 165(16.9,7.25) 166(16.9,7.75) 167(16.9,8.25) 168(16.9,8.75) 169(16.9,9.25) 170(16.9,9.75) 171(16.9,10.25) 172(16.9,10.75) 173(16.9,11.25) 174(16.9,11.75) 175(16.9,12.25) 176(16.9,12.75) 177(16.9,13.25) 178(16.9,13.75) 179(16.9,14.25) 180(16.9,14.75)
  rrect50% 0.3x1.65 smd: 61(-14.75,-16.9) 62(-14.25,-16.9) 63(-13.75,-16.9) 64(-13.25,-16.9) 65(-12.75,-16.9) 66(-12.25,-16.9) 67(-11.75,-16.9) 68(-11.25,-16.9) 69(-10.75,-16.9) 70(-10.25,-16.9) 71(-9.75,-16.9) 72(-9.25,-16.9) 73(-8.75,-16.9) 74(-8.25,-16.9) 75(-7.75,-16.9) 76(-7.25,-16.9) 77(-6.75,-16.9) 78(-6.25,-16.9) 79(-5.75,-16.9) 80(-5.25,-16.9) 81(-4.75,-16.9) 82(-4.25,-16.9) 83(-3.75,-16.9) 84(-3.25,-16.9) 85(-2.75,-16.9) 86(-2.25,-16.9) 87(-1.75,-16.9) 88(-1.25,-16.9) 89(-0.75,-16.9) 90(-0.25,-16.9) 91(0.25,-16.9) 92(0.75,-16.9) 93(1.25,-16.9) 94(1.75,-16.9) 95(2.25,-16.9) 96(2.75,-16.9) 97(3.25,-16.9) 98(3.75,-16.9) 99(4.25,-16.9) 100(4.75,-16.9) 101(5.25,-16.9) 102(5.75,-16.9) 103(6.25,-16.9) 104(6.75,-16.9) 105(7.25,-16.9) 106(7.75,-16.9) 107(8.25,-16.9) 108(8.75,-16.9) 109(9.25,-16.9) 110(9.75,-16.9) 111(10.25,-16.9) 112(10.75,-16.9) 113(11.25,-16.9) 114(11.75,-16.9) 115(12.25,-16.9) 116(12.75,-16.9) 117(13.25,-16.9) 118(13.75,-16.9) 119(14.25,-16.9) 120(14.75,-16.9) 181(14.75,16.9) 182(14.25,16.9) 183(13.75,16.9) 184(13.25,16.9) 185(12.75,16.9) 186(12.25,16.9) 187(11.75,16.9) 188(11.25,16.9) 189(10.75,16.9) 190(10.25,16.9) 191(9.75,16.9) 192(9.25,16.9) 193(8.75,16.9) 194(8.25,16.9) 195(7.75,16.9) 196(7.25,16.9) 197(6.75,16.9) 198(6.25,16.9) 199(5.75,16.9) 200(5.25,16.9) 201(4.75,16.9) 202(4.25,16.9) 203(3.75,16.9) 204(3.25,16.9) 205(2.75,16.9) 206(2.25,16.9) 207(1.75,16.9) 208(1.25,16.9) 209(0.75,16.9) 210(0.25,16.9) 211(-0.25,16.9) 212(-0.75,16.9) 213(-1.25,16.9) 214(-1.75,16.9) 215(-2.25,16.9) 216(-2.75,16.9) 217(-3.25,16.9) 218(-3.75,16.9) 219(-4.25,16.9) 220(-4.75,16.9) 221(-5.25,16.9) 222(-5.75,16.9) 223(-6.25,16.9) 224(-6.75,16.9) 225(-7.25,16.9) 226(-7.75,16.9) 227(-8.25,16.9) 228(-8.75,16.9) 229(-9.25,16.9) 230(-9.75,16.9) 231(-10.25,16.9) 232(-10.75,16.9) 233(-11.25,16.9) 234(-11.75,16.9) 235(-12.25,16.9) 236(-12.75,16.9) 237(-13.25,16.9) 238(-13.75,16.9) 239(-14.25,16.9) 240(-14.75,16.9)
  silkscreen extent -15.67,-15.67 15.68,15.68, body extent -16,-16 16,16, height 4.1
PS2-6PIN [mm] "PS2 Socket, 6 Pin, Through Hole"
  round 1.8 hole 1: 1(-1.3,-8.5) 2(1.3,-8.5) 3(-3.4,-8.5) 4(3.4,-8.5) 5(-3.4,-11) 6(3.4,-11)
  round 4 hole 2.3: 7(-6.75,-5.5) 8(0,-4.75) 9(6.75,-5.5)
  silkscreen extent -7,-13 7,0, body extent -7.13,-13.1 7.13,0.1, height 13
PUSHBUTTON [mm]
  oval 2.6x3 hole 1.3: 1(-0.25,-3.5) 1(12.25,-3.5) 2(-0.25,-8.5) 2(12.25,-8.5)
  silkscreen extent 0,-12 12,0, body extent 0,-12 12,0, height 5
QFN24 [mm] "QFN, 24-Leads, Body 5,00x3,00mm, Pitch 0,50mm, Thermal Pad 3,65x1,65mm, IPC Medium Density"
  oval 1.4x0.3 smd: 1(-1.8,1.75) 2(-1.8,1.25) 3(-1.8,0.75) 4(-1.8,0.25) 5(-1.8,-0.25) 6(-1.8,-0.75) 7(-1.8,-1.25) 8(-1.8,-1.75) 13(1.8,-1.75) 14(1.8,-1.25) 15(1.8,-0.75) 16(1.8,-0.25) 17(1.8,0.25) 18(1.8,0.75) 19(1.8,1.25) 20(1.8,1.75)
  oval 0.3x1.4 smd: 9(-0.75,-2.8) 10(-0.25,-2.8) 11(0.25,-2.8) 12(0.75,-2.8) 21(0.75,2.8) 22(0.25,2.8) 23(-0.25,2.8) 24(-0.75,2.8)
  rect 1.65x3.65 smd: 25(0,0)
  silkscreen extent -2.47,-2.7 1.7,2.7, body extent -1.55,-2.55 1.55,2.55, height 0.8
QFN38 [mm] "QFN, 38-Leads, Body 7,00x5,00mm, Pitch 0,50mm, Thermal Pad 5,15x3,15mm, IPC Medium Density"
  oval 1.4x0.3 smd: 1(-2.8,2.75) 2(-2.8,2.25) 3(-2.8,1.75) 4(-2.8,1.25) 5(-2.8,0.75) 6(-2.8,0.25) 7(-2.8,-0.25) 8(-2.8,-0.75) 9(-2.8,-1.25) 10(-2.8,-1.75) 11(-2.8,-2.25) 12(-2.8,-2.75) 20(2.8,-2.75) 21(2.8,-2.25) 22(2.8,-1.75) 23(2.8,-1.25) 24(2.8,-0.75) 25(2.8,-0.25) 26(2.8,0.25) 27(2.8,0.75) 28(2.8,1.25) 29(2.8,1.75) 30(2.8,2.25) 31(2.8,2.75)
  oval 0.3x1.4 smd: 13(-1.5,-3.8) 14(-1,-3.8) 15(-0.5,-3.8) 16(0,-3.8) 17(0.5,-3.8) 18(1,-3.8) 19(1.5,-3.8) 32(1.5,3.8) 33(1,3.8) 34(0.5,3.8) 35(0,3.8) 36(-0.5,3.8) 37(-1,3.8) 38(-1.5,3.8)
  rect 3.15x5.15 smd: 39(0,0)
  silkscreen extent -3.47,-3.7 2.7,3.7, body extent -2.55,-3.55 2.55,3.55, height 0.8
S8 [mm] "SOIC, 8-Leads, Body 4,90x3,90mm, Pitch 1,27mm, IPC Medium Density"
  oval 2.2x0.6 smd: 1(-2.4,1.905) 2(-2.4,0.635) 3(-2.4,-0.635) 4(-2.4,-1.905) 5(2.4,-1.905) 6(2.4,-0.635) 7(2.4,0.635) 8(2.4,1.905)
  silkscreen extent -2.52,-2.5 0.9,2.88, body extent -2,-2.5 2,2.5, height 1.76
SOIC16 [mm]
  oval 2.5x0.75 smd: 1(-4.575,4.445) 2(-4.575,3.175) 3(-4.575,1.905) 4(-4.575,0.635) 5(-4.575,-0.635) 6(-4.575,-1.905) 7(-4.575,-3.175) 8(-4.575,-4.445) 9(4.575,-4.445) 10(4.575,-3.175) 11(4.575,-1.905) 12(4.575,-0.635) 13(4.575,0.635) 14(4.575,1.905) 15(4.575,3.175) 16(4.575,4.445)
  silkscreen extent -4.7,-5.25 3.02,5.49, body extent -3.8,-5.25 3.8,5.25, height 2.65
SOT23_BAT54S [mm]
  rect 1.15x0.6 smd: 1(-1.125,0.95) 2(-1.125,-0.95) 3(1.125,0)
  silkscreen extent -1.25,-1.5 0.7,2.13, body extent -0.7,-1.5 0.7,1.5, height 1.1
SSOP28 [mm] "SOP, 28-Leads, Body 10,20x5,30mm, Pitch 0,65mm, IPC Medium Density"
  oval 2.1x0.45 smd: 1(-3.45,4.225) 2(-3.45,3.575) 3(-3.45,2.925) 4(-3.45,2.275) 5(-3.45,1.625) 6(-3.45,0.975) 7(-3.45,0.325) 8(-3.45,-0.325) 9(-3.45,-0.975) 10(-3.45,-1.625) 11(-3.45,-2.275) 12(-3.45,-2.925) 13(-3.45,-3.575) 14(-3.45,-4.225) 15(3.45,-4.225) 16(3.45,-3.575) 17(3.45,-2.925) 18(3.45,-2.275) 19(3.45,-1.625) 20(3.45,-0.975) 21(3.45,-0.325) 22(3.45,0.325) 23(3.45,0.975) 24(3.45,1.625) 25(3.45,2.275) 26(3.45,2.925) 27(3.45,3.575) 28(3.45,4.225)
  silkscreen extent -3.58,-5.25 2,5.25, body extent -2.8,-5.25 2.8,5.25, height 2
TO-227A [mm]
  rect 5.2x2.1 smd: 1(0,-2.9)
  rect 5.2x5 smd: 2(0,1.5)
  silkscreen extent -2.37,-1.6 2.38,-1.2, body extent -2.7,-4.05 2.7,4.1, height 1.2
TQFP100 [mm]
  rrect50% 1.65x0.42 smd: 1(-7.625,9.425) 2(-7.625,8.775) 3(-7.625,8.125) 4(-7.625,7.475) 5(-7.625,6.825) 6(-7.625,6.175) 7(-7.625,5.525) 8(-7.625,4.875) 9(-7.625,4.225) 10(-7.625,3.575) 11(-7.625,2.925) 12(-7.625,2.275) 13(-7.625,1.625) 14(-7.625,0.975) 15(-7.625,0.325) 16(-7.625,-0.325) 17(-7.625,-0.975) 18(-7.625,-1.625) 19(-7.625,-2.275) 20(-7.625,-2.925) 21(-7.625,-3.575) 22(-7.625,-4.225) 23(-7.625,-4.875) 24(-7.625,-5.525) 25(-7.625,-6.175) 26(-7.625,-6.825) 27(-7.625,-7.475) 28(-7.625,-8.125) 29(-7.625,-8.775) 30(-7.625,-9.425) 51(7.625,-9.425) 52(7.625,-8.775) 53(7.625,-8.125) 54(7.625,-7.475) 55(7.625,-6.825) 56(7.625,-6.175) 57(7.625,-5.525) 58(7.625,-4.875) 59(7.625,-4.225) 60(7.625,-3.575) 61(7.625,-2.925) 62(7.625,-2.275) 63(7.625,-1.625) 64(7.625,-0.975) 65(7.625,-0.325) 66(7.625,0.325) 67(7.625,0.975) 68(7.625,1.625) 69(7.625,2.275) 70(7.625,2.925) 71(7.625,3.575) 72(7.625,4.225) 73(7.625,4.875) 74(7.625,5.525) 75(7.625,6.175) 76(7.625,6.825) 77(7.625,7.475) 78(7.625,8.125) 79(7.625,8.775) 80(7.625,9.425)
  rrect50% 0.42x1.65 smd: 31(-6.175,-10.625) 32(-5.525,-10.625) 33(-4.875,-10.625) 34(-4.225,-10.625) 35(-3.575,-10.625) 36(-2.925,-10.625) 37(-2.275,-10.625) 38(-1.625,-10.625) 39(-0.975,-10.625) 40(-0.325,-10.625) 41(0.325,-10.625) 42(0.975,-10.625) 43(1.625,-10.625) 44(2.275,-10.625) 45(2.925,-10.625) 46(3.575,-10.625) 47(4.225,-10.625) 48(4.875,-10.625) 49(5.525,-10.625) 50(6.175,-10.625) 81(6.175,10.625) 82(5.525,10.625) 83(4.875,10.625) 84(4.225,10.625) 85(3.575,10.625) 86(2.925,10.625) 87(2.275,10.625) 88(1.625,10.625) 89(0.975,10.625) 90(0.325,10.625) 91(-0.325,10.625) 92(-0.975,10.625) 93(-1.625,10.625) 94(-2.275,10.625) 95(-2.925,10.625) 96(-3.575,10.625) 97(-4.225,10.625) 98(-4.875,10.625) 99(-5.525,10.625) 100(-6.175,10.625)
  silkscreen extent -6.4,-9.4 6.4,9.4, body extent -7,-10 7,10, height 1.6
USB_B [mm]
  rect 1.6x1.6 hole 0.95: 1(1.25,0)
  round 1.6 hole 0.95: 2(-1.25,0) 3(-1.25,-2) 4(1.25,-2)
  round 4.2 hole 2.4: 5(-6.02,-4.3) 6(6.02,-4.3)
  silkscreen extent -6.1,-15.25 6.1,2.18, body extent -6.23,-15.38 6.23,1.38, height 11
VGA_SOCKET [mm]
  round 1.4 hole 0.6: 1(1.81,-11.393) 2(1.81,-13.683) 3(1.81,-15.972) 4(1.81,-18.262) 5(1.81,-20.553) 6(3.79,-10.248) 7(3.79,-12.537) 8(3.79,-14.827) 9(3.79,-17.118) 10(3.79,-19.407) 11(5.77,-11.393) 12(5.77,-13.683) 13(5.77,-15.972) 14(5.77,-18.262) 15(5.77,-20.553)
  oval 7x6 hole 3.2: 16(3.79,-2.905) 17(3.79,-27.895)
  silkscreen extent 0,-30.88 14.8,0.02, body extent -0.13,-31 14.8,0.2, height 12.5

## Part data
C1 C8 C10 C48 C49 C50 C51 C52 C53 C55 C56 C59 C60 C61 C62 C64 C65 C66 C67 C72 C73 C141 C142: "Polarized Capacitor (Axial)"
C2 C3 C4 C5 C6 C7 C9 C11 C12 C13 C14 C15 C16 C17 C18 C19 C20 C21 C22 C23 C24 C25 C26 C27 C28 C29 C30 C31 C32 C33 C34 C35 C36 C37 C38 C39 C40 C41 C42 C43 C44 C45 C46 C47 C54 C57 C58 C63 C68 C69 C70 C71 C74 C75 C76 C77 C78 C79 C80 C81 C82 C83 C84 C85 C86 C87 C88 C89 C92 C93 C94 C95 C96 C97 C98 C99 C100 C101 C102 C103 C104 C105 C106 C109 C110 C111 C112 C113 C114 C115 C116 C117 C118 C119 C120 C121 C122 C123 C124 C125 C126 C127 C128 C129 C130 C131 C132 C133 C134 C135 C136 C137 C138 C139 C140 C145: "Capacitor"
C90 C91 C107 C108 C143 C144: library part "Cap Pol2", "Polarized Capacitor (Axial)"
D2 D3: library part LED3, "Amber"
D4: "Amber"
D17 D24: library part LED3, "Green"
D18: library part LED3, "Red"
D23: library part "D Schottky", "Schottky Diode"
J1 J3: library part "Connector 15", "Receptacle Assembly, 15-Pin, Sim Line Connector"
J2: library part SW-SPDT
J4: library part PS2_Socket
J5: library part "Header 10X2A", "Header, 10-Pin, Dual row"
J6: library part USB_B
J7: library part PWR2.5, "Low Voltage Power Supply Connector"
J8: library part "Header 3X2A", "Header, 3-Pin, Dual row"
R1 R2 R3 R4 R5 R6 R7 R8 R9 R10 R11 R12 R13 R14 R15 R16 R17 R18 R19 R20 R21 R22 R23 R24 R25 R26 R27 R28 R29 R30 R31 R32 R33 R34 R35 R36 R37 R38 R39 R40 R41 R42 R43 R44 R45 R46 R47 R48: "Resistor"
S1 S2: library part SW-PB, "Switch"
U5 U6: "Step-Down, 6A, 4MHz"
U8: library part JTAG_CONN
U9: library part EPCS16SI16N, "EPCS16 Series, In-system programmable 3.3V serial configuration device, 16-Pin SOIC, 16-Megabit, Industrial Grade, Pb-Free"
U10: "18Mb 36-bit SRAM"
X1: library part FOX924B-10MHz
X2: library part ASDMB-50.000MHZ-LY-T

## Free pads (board coordinates)
  round 6 hole 3.55: ""(30,30) ""(49,115) ""(140,30) ""(140,115)

## Via types
v1: diameter 0.71, hole 0.3, Top Layer to Bottom Layer, 393 vias
v2: diameter 1.4, hole 0.6, Top Layer to Bottom Layer, 32 vias
v3: diameter 2, hole 0.9, Top Layer to Bottom Layer, 4 vias
v4: diameter 1.2, hole 0.5, Top Layer to Bottom Layer, 1 vias

## Nets (pads, with @x,y where several pads share a name; then routed paths per layer and width w, separated by ;. In a path a pad name is that pad's centre, name@x,y a point inside that pad or via, vN(x,y) a via of type N, cw(c..) or ccw(c..) an arc to the next point about the centre after c; other vN are vias at no path point)
1.2V: C10.1 C22.1 C23.1 C24.1 C25.1 C26.1 C27.1 C28.1 C29.1 C30.1 C31.1 C32.1 C33.1 C34.1 C35.1 C36.1 C37.1 C38.1 C50.1 C51.1 C52.1 C53.1 C54.2 C86.1 C87.1 C92.1 C93.1 C96.1 C97.1 C100.1 C101.1 C104.1 C105.1 C109.1 C110.1 C112.1 C113.1 C115.1 C116.1 C118.1 C119.1 C121.1 C122.1 C124.1 C125.1 C127.1 C128.1 C130.1 C131.1 C133.1 C134.1 C136.1 C138.1 C140.1 C141.1 C142.1 C143.1 C144.1 C145.1 L1.2 R29.1 U2.1 U2.6 U2.14 U2.18 U2.21 U2.25 U2.32 U2.40 U2.46 U2.56 U2.64 U2.73 U2.82 U2.93 U2.102 U2.110 U2.119 U2.126 U7.1 U7.4 U7.10 U7.19 U7.40 U7.53 U7.60 U7.61 U7.64 U7.71 U7.74 U7.85 U7.101 U7.108 U7.115 U7.119 U7.121 U7.129 U7.140 U7.147 U7.163 U7.167 U7.174 U7.180 U7.181 U7.190 U7.198 U7.204 U7.220 U7.228 U7.233 U7.237 | length 418
  Top Layer w0.2: U7.181@89.55,91.7 v1(92.9,91.7) ; U7.121@91.7,60.05 93.15,60.05 93.4,59.8 93.4,59.1 93.7,58.8 C87.1@94.1,58.8 ; U2.126@115.66,87.953 116.705,87.953 116.91,87.748 U2.1@116.91,85.903 116.257,85.25 v1(116.109,85.25) ; U2.119@115.66,90.753 116.747,90.753 v1(117.203,90.298) ; U2.110@115.66,94.353 116.748,94.353 v1@117.203,93.898 ; U2.102@115.66,97.553 v1@117.155,97.553 ; U2.93@118.11,100.803 118.11,99.758 118.315,99.553 118.473,99.553 v1(118.753,99.274) ; U2.6@118.91,85.903 118.91,86.954 119.41,87.454 v1(119.81,87.454) ; U2.14@122.11,85.903 122.11,86.98 122.553,87.423 v1(123.003,87.423) 123.276,87.423 123.71,86.989 U2.18@123.71,85.903 ; U2.82@122.51,100.803 122.51,99.517 v1(122.778,99.249) ; U2.21@124.91,85.903 v1@124.91,87.398 ; U2.73@126.11,100.803 126.11,99.717 v1(126.578,99.249) ; U2.25@126.51,85.903 v1@126.51,87.398 ; v1(128.985,96.854) 129.014,96.854 129.515,96.353 U2.56@130.56,96.353 ; v1(129.003,89.498) 129.06,89.498 129.515,89.953 U2.40@130.56,89.953 ; v1(129.003,91.898) 129.459,92.353 U2.46@130.56,92.353 ; U2.32@129.31,85.903 v1(130.111,85.903) ; v1@130.31,100.354 U2.64@130.56,99.553
  Top Layer w0.3: v1(54.825,60.05) U7.60@57.9,60.05 ; v1(54.825,63.55) U7.53@57.9,63.55 ; v1(54.825,80.55) U7.19@57.9,80.55 ; v1(54.825,85.05) U7.10@57.9,85.05 ; v1(54.825,88.05) U7.4@57.9,88.05 ; v1(55.35,70.15) 55.45,70.05 U7.40@57.9,70.05 ; v1(56.95,92) 58.425,90.525 U7.1@58.425,89.6 ; v1(60.05,54.85) U7.61@60.05,57.9 ; v1(61.55,54.85) U7.64@61.55,57.9 ; U7.237@61.55,91.7 v1(61.55,94.775) ; U7.233@63.55,91.7 v1(63.55,94.775) ; v1(65.05,54.85) U7.71@65.05,57.9 ; U7.228@66.05,91.7 v1(66.05,94.775) ; v1(66.55,54.85) U7.74@66.55,57.9 ; U7.220@70.05,91.7 v1(70.05,94.775) ; U7.85@72.05,57.9 72.05,55.35 v1(72.5,54.9) ; v1(77.879,94.78) 78.05,94.608 U7.204@78.05,91.7 ; v1(80.05,54.85) U7.101@80.05,57.9 ; U7.198@81.05,91.7 v1(81.05,94.775) ; v1(82.45,45.2) 82.5,45.15 R29.1@83.95,45.15 ; v1@83.55,54.9 U7.108@83.55,57.9 ; U7.190@85.05,91.7 v1(85.05,94.775) ; v1@87.05,54.9 U7.115@87.05,57.9 ; v1(89.05,54.85) 89.05,56.5 ; U7.119@89.05,57.9 89.05,56.5 ; U7.121@91.7,60.05 91.7,57.2 91,56.5 89.05,56.5 ; U7.129@91.7,64.05 93.375,64.05 93.55,64.225 93.55,64.236 94.5,65.186 v1@94.5,67.75 ; U7.140@91.7,69.55 95.475,69.55 v1@95.525,69.5 ; U7.147@91.7,73.05 v1@94.775,73.05 ; U7.163@91.7,81.05 v1@94.8,81.05 ; U7.167@91.7,83.05 v1@94.725,83.05 ; U7.174@91.7,86.55 94.275,86.55 v1(94.55,86.825) ; U7.180@91.7,89.55 v1@94.6,89.55 ; v1@95.005,89.55 v1@95.03,89.575
  Top Layer w2: v2(61.571,44.741) v2(62.621,44.741) v2(67.871,44.741)
  Bottom Layer w0.2: v1(92.9,91.7) v1@93,91.6
  Bottom Layer w0.3: C53.1@67.821,45.391 C53.1@67.871,45.391 ; v2(67.871,44.741) 71.041,44.741 73.8,47.5 80.3,47.5 v1@82.45,45.35 ; C53.1@68.321,45.391 C53.1@68.491,45.391 ; 94.5,68.65 94.6,68.75 ; 94.6,69.85 94.6,70 ; v1@94.7,86.55 v1@94.725,86.525 ; v1@94.775,73.05 v1@94.8,73.025 ; v1@94.8,81.05 v1@94.825,81.075 ; C33.1@116.116,90.298 v1(117.203,90.298) ; C32.1@116.116,93.898 v1@117.203,93.898 ; C31.1@116.116,97.273 v1(117.203,97.273) ; v1(118.753,99.274) C10.1@118.753,100.247 C10.1@118.81,100.304 ; C38.1@119.81,85.903 v1(119.81,87.454) ; v1(122.778,99.249) C29.1@122.778,100.423 ; C22.1@123.003,85.872 123.003,85.953 v1(123.003,87.423) ; C24.1@124.855,85.902 v1(124.855,87.453) ; C25.1@126.253,85.897 126.253,85.903 v1(126.253,87.448) ; v1(126.578,99.249) 126.61,99.28 C34.1@126.61,100.454 ; v1(128.985,96.854) 129.035,96.804 C28.1@130.26,96.804 ; v1(129.003,89.498) C26.1@130.26,89.498 ; v1(129.003,91.898) C27.1@130.26,91.898
  Bottom Layer w0.5: C38.1@119.81,85.854 C38.1@119.859,85.903
  Bottom Layer w0.8: 94.95,74.275 95.15,74.075 108.375,74.075 116.009,81.709 116.009,85.903 116.01,99.66 ; 115.985,99.66 116.629,100.304 C10.1@118.81,100.304 ; C10.1@118.81,100.354 127.684,100.354 130.26,100.354 130.26,100.304 130.26,96.804 130.26,91.898 C26.1@130.26,89.498 ; 120.075,85.954 C22.1@123.01,85.954 ; C22.1@123.003,85.953 v1@130.086,85.953 ; v1@130.26,86.177 C26.1@130.26,89.554
  Bottom Layer w1.1: v2@61.821,45.391 62.621,45.391 63.671,45.391 63.821,45.391 v2@64.721,45.391 ; v2@64.871,44.741 v2@64.871,45.391 ; C52.1@65.355,45.391 66.821,45.391 C53.1@67.821,45.391
  Bottom Layer w2: 60.8,44.741 v2(64.721,44.741) 64.871,44.741 v2(65.771,44.741) v2(66.821,44.741) v2(67.871,44.741) 68.321,44.741 68.8,44.741 ; v1@61.55,94.8 59.625,94.8 ; v1@66.25,54.839 v1@66.264,54.825 ; 89.675,54.825 v1@66.264,54.825 ; 94.6,68.75 94.6,69.85 ; 94.6,70 94.6,90.451 94.445,90.606 94.445,90.655 90.3,94.8 59.625,94.8 ; 59.625,94.8 C144.1@57.4,92.575 57.4,92.413 56.817,91.83 56.681,91.83 54.695,89.844 54.695,86.356 54.7,86.351 54.7,59.875 59.75,54.825 v1@66.264,54.825
  Bottom Layer w3: C53.1@68.071,45.391 68.071,53.925
  other v1: 83.55,54.85 87.05,54.85 94.5,67.975 95.625,69.45 94.825,73.05 94.825,81.05 94.825,83.05 94.825,89.575 117.153,93.898 130.285,100.354
  other v2: 63.671,44.741
2.5V: C60.1 C61.1 C62.1 C63.2 C89.1 C90.1 C91.1 C95.1 C99.1 C103.1 J8.3 L2.2 R34.1 R38.1 R39.1 U7.3 U7.58 U7.123 U7.178 U8.4 | length 277.3
  Top Layer w0.3: U8.4@32.48,100.8 U8.4@32.48,101.36 31.46,101.36 30.75,100.65 30.75,97.35 31.6,96.5 32.675,96.5 40.85,88.325 40.85,77.848 43.748,74.95 v1(53.145,74.95) v1@52.995,75.1 ; v1(53.1,61) 53.15,61.05 54.55,61.05 ; v1(53.117,88.783) 53.135,88.8 54.2,88.8 ; C103.1@53.5,89.5 54.2,88.8 ; C89.1@53.6,60.1 54.55,61.05 ; 54.7,88.8 54.2,88.8 ; 55.6,61.05 54.55,61.05 ; U7.58@57.9,61.05 54.55,61.05 ; U7.3@57.9,88.55 55.35,88.55 55.1,88.8 54.2,88.8 ; U7.123@91.7,61.05 96.15,61.05 ; U7.178@91.7,88.55 95.15,88.55 v1(96.2,89.6) 96.1,89.7 C99.1@96.1,90.8 ; v2(92.425,46.25) L2.2@93.65,47.475 ; L2.2@93.725,47.25 98.175,47.25 C63.2@99.45,48.525 ; R34.1@99.45,50.425 C63.2@99.45,48.575 ; C63.2@99.5,48.35 99.575,48.35 99.45,48.475 C63.2@99.45,48.525 ; C63.2@99.45,48.525 C63.2@99.5,48.575 C63.2@99.45,48.575 ; C63.2@99.45,48.525 C63.2@99.45,48.575
  Top Layer w0.6: v1(92.425,51.925) 92.425,52.15 96.5,56.225 96.5,66.625 ; v1(96.5,73.1) v1@98.35,74.95
  Top Layer w1.4: v2(89.925,46.25) v2(92.425,46.25) v2(94.925,46.25)
  Bottom Layer w0.3: U8.4@32.48,101.36 31.915,101.36 30.75,102.525 30.75,110.425 32.938,112.613 ; R38.1@33.475,112.025 32.938,112.562 32.938,112.613 ; R39.1@36.95,112.275 36.125,113.1 33.425,113.1 32.938,112.613 ; v1@53,88.9 v1(53.117,88.783) ; v1(53.145,74.95) 53.195,74.95 v1@53.35,74.95 ; v1@53.195,61 53.195,59.055 55.75,56.5 55.75,55.25 C91.1@56,55 ; 93.471,93.75 93.471,93.971 ; 96.43,81.75 C90.1@98.25,81.75
  Bottom Layer w0.6: v1@53.195,61 53.195,74.95 53.195,90.491 59.004,96.3 90.921,96.3 93.471,93.75 96.43,90.791 96.43,81.75 96.43,77.17 v1(98.5,75.1) ; J8.3@71.82,31.3 73.445,32.925 88.325,32.925 90.45,35.05 90.45,37.25 87.4,40.3 87.4,46.4 88.25,47.25 90.4,47.25 ; v2@89.925,46.657 C60.1@89.925,47.25 ; C61.1@92.425,47.1 v1(92.425,51.925) ; v1@96.525,66.875 v1@96.525,73.1
  Bottom Layer w1.1: C60.1@89.925,47.25 C61.1@92.425,47.25 C62.1@94.925,47.25
  other v1: 96.5,67